# Altium PCB PCB_mounting.PcbDoc (part 3 of 4)
Units mm, origin at the board's own origin, x right, y up, seen from the top; angles counter-clockwise.
Board outline 75 x 100 mm, 4 copper layers (Top Layer, Int1 (GND), Int2 (PWR), Bottom Layer), stack 1.586 mm thick; 145 components, 97 nets, 660 pads, 380 vias.
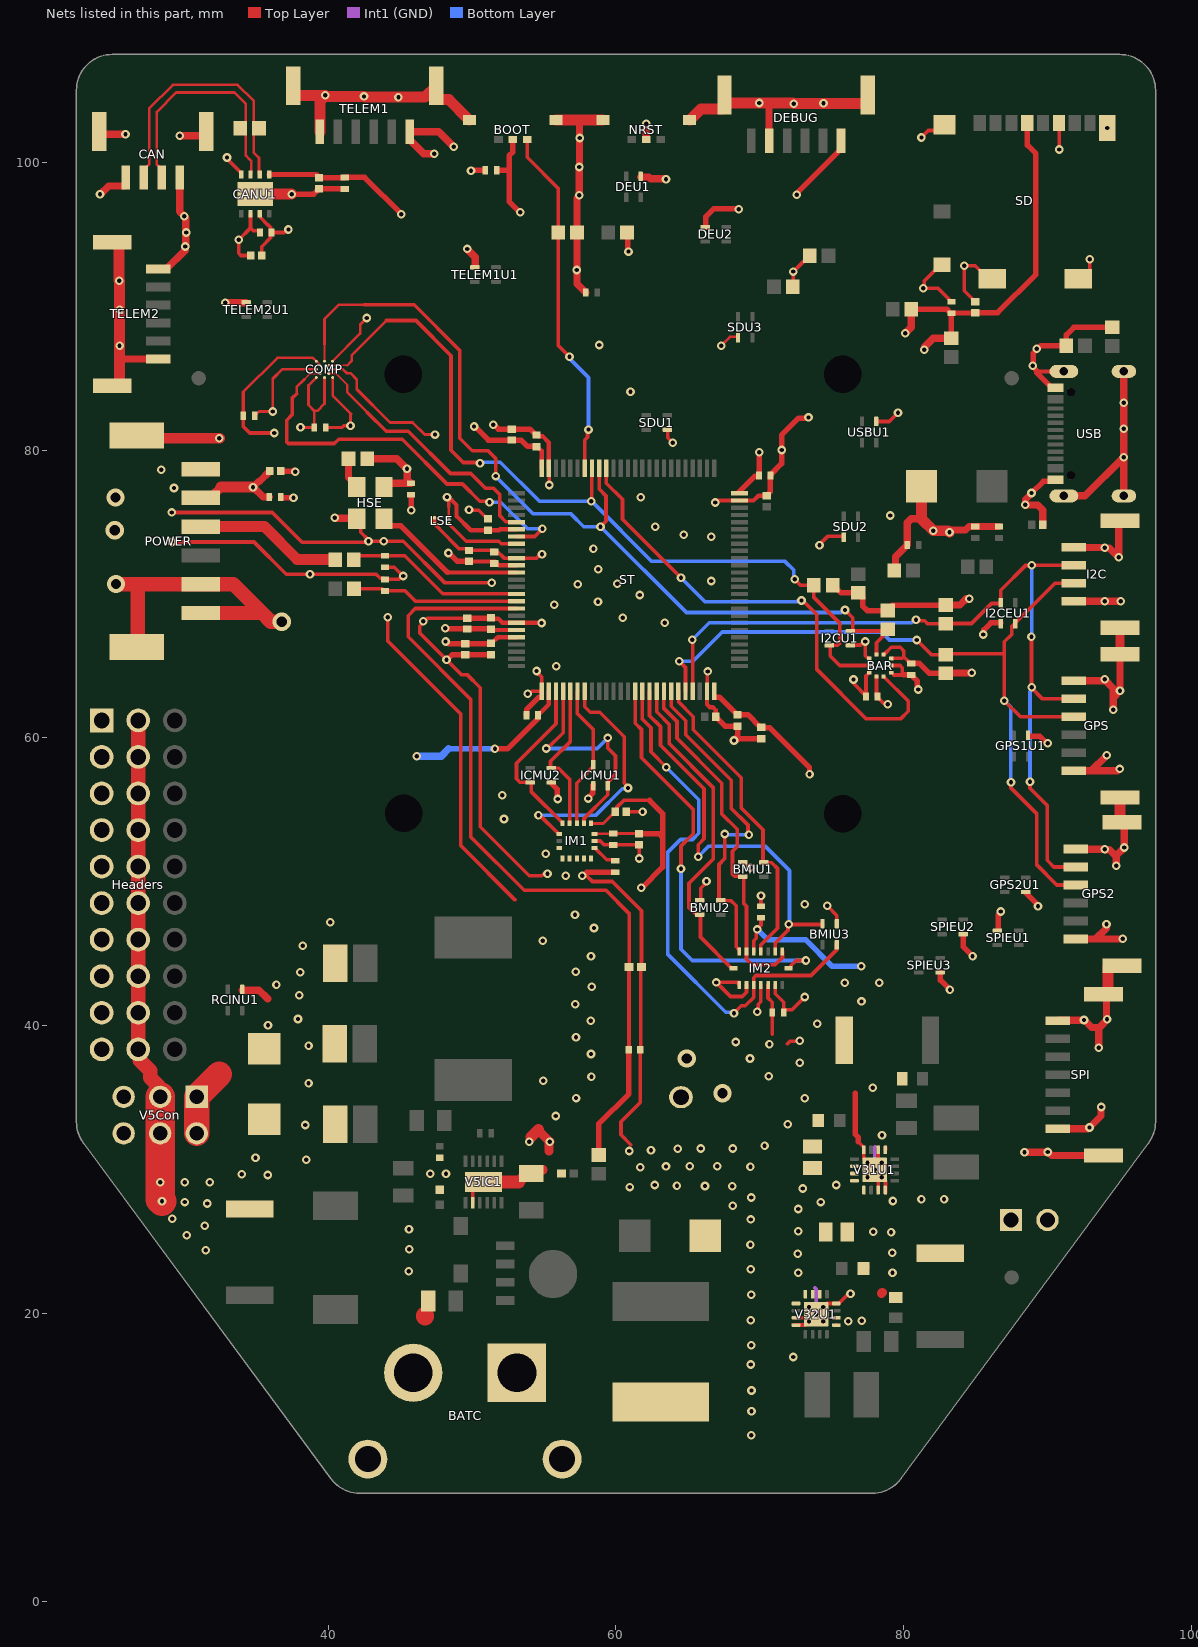
[diagram p4: the nets of this part, all layers, seen from the top]

## Via types
v1: diameter 0.6, hole 0.3, Top Layer to Bottom Layer, 358 vias
v2: diameter 0.5, hole 0.3, Top Layer to Bottom Layer, 10 vias
v3: diameter 1.27, hole 0.711, Top Layer to Bottom Layer, 6 vias
v4: diameter 0.55, hole 0.3, Top Layer to Bottom Layer, 6 vias

## Nets (pads, with @x,y where several pads share a name; then routed paths per layer and width w, separated by ;. In a path a pad name is that pad's centre, name@x,y a point inside that pad or via, vN(x,y) a via of type N, cw(c..) or ccw(c..) an arc to the next point about the centre after c; other vN are vias at no path point)
"+3V3 Core": BAR.1 BAR.6 BAR.10 BMIC1.1 BMIC2.1 BMMC1.1 BMMC2.1 BMPC1.1 BMPC2.1 BOOT.3 BOOTC1.1 CANC3.1 CANC4.1 CANU1.5 COMP.A1 COMP.B2 COMP.E5 DEBUG.1 HSE.4 HSEC1.1 HSER1.1 I2CER1.1 I2CER2.1 I2CR1.1 I2CR2.1 ICMC1.1 ICMC2.1 ICMC3.1 IM1.1 IM1.16 IM2.3 IM2.11 LSE.3 NRSTR.2 pad.8 SD.4 SDC1.1 SDC2.1 SDR1.1 SDR2.1 SDR3.1 SDR4.1 SDR5.1 ST.6 ST.11 ST.20 ST.21 ST.27 ST.50 ST.75 ST.100 STC1.1 STC2.1 STC3.1 STC4.1 STC5.1 STC6.1 STC7.1 STC8.1 STC9.1 STC10.1 STC11.1 STC12.1 STC13.1 V31R0.2 | length 183.2
  Top Layer w0.178: 36.474,86.411 38.938,86.411 COMP.A1@39.175,86.174 COMP.B2@39.458,85.891 ; COMP.E5@40.307,85.042 40.307,83.802 41.59,82.52 ; LSE.3@48.387,75.286 48.387,76.068
  Top Layer w0.191: 34.093,84.03 36.474,86.411
  Top Layer w0.2: IM1.1@58.277,54.057 59.118,54.057 59.925,54.864 ICMC3.1@59.946,54.864 ; IM1.16@58.502,53.332 59.79,53.332 ICMC1.1@59.817,53.359 59.828,53.348 61.584,53.348 ICMC2.1@61.595,53.338
  Top Layer w0.229: BMMC1.1@39.833,81.572 40.975,81.572 41.089,81.686 41.548,81.686 v1(41.554,81.693) 41.554,82.484
  Top Layer w0.254: 34.093,84.03 BMMC2.1@34.093,82.385 34.093,81.642 34.544,81.191 v1(36.246,81.191) ; v1(48.26,76.733) 48.387,76.606 48.387,76.068 ; v1@48.434,76.653 48.524,76.563 48.545,76.563 ; STC4.1@49.784,72.265 STC4.1@49.795,72.255 ; STC7.1@51.551,72.255 STC7.1@51.562,72.244 ; 51.873,74.428 51.938,74.493 ; STC6.1@54.578,61.62 54.651,61.693 STC6.1@54.701,61.693 ; ICMC3.1@59.946,54.864 59.968,54.864 60.077,54.973 60.077,55.194 60.535,55.651 62.332,55.651 ; ST.50@66.833,63.243 66.833,62.874 ST.50@66.874,62.833 ; STC10.1@68.403,61.614 STC10.1@68.453,61.614 ; ST.75@68.583,76.993 ST.75@68.583,77.117 ; IM2.11@69.571,45.154 69.571,45.877 69.758,46.065 69.758,46.619 v1(69.825,46.685) 69.825,46.74 70.079,46.994 BMIC2.1@70.079,47.504 ; STC11.1@70.054,60.725 STC11.1@70.104,60.725 ; IM2.3@70.571,42.824 70.571,41.913 70.86,41.624 BMIC1.1@70.86,40.919 70.86,39.395 ; 71.922,38.746 72.09,38.914 72.747,38.914 v1(72.771,38.938) ; SDR5.1@72.278,91.351 72.326,91.4 v1(72.326,92.405) 72.717,92.796 72.717,92.798 73.417,93.497 SDR4.1@73.467,93.497 ; BAR.6@78.109,64.259 78.109,62.931 BMPC1.1@78.175,62.865 78.175,62.815 78.592,62.398 78.826,62.398 v1(78.892,62.332) ; BAR.1@78.609,65.789 78.624,65.789 79.129,66.294 79.756,66.294 80.01,66.04 80.01,65.628 ; BAR.10@79.124,65.524 79.906,65.524 80.01,65.628 ; BMPC2.1@80.518,65.17 80.468,65.17 80.01,65.628 ; SDC2.1@84.952,89.527 SDC2.1@84.963,89.537
  Top Layer w0.3: 48.545,76.563 48.923,76.185 48.923,75.41 49.905,74.428 STC5.1@51.105,74.428 51.873,74.428 ; STC4.1@49.795,72.255 STC7.1@51.551,72.255 ; STC13.1@51.308,67.545 51.358,67.495 51.582,67.495 51.584,67.493 ST.20@53.083,67.493 ; STC9.1@51.358,66.567 51.784,66.993 ST.21@53.083,66.993 ; STC7.1@51.612,72.244 51.863,71.993 ST.11@53.083,71.993 ; 51.938,74.493 ST.6@53.083,74.493 ; STC12.1@54.533,80.245 54.833,79.945 ST.100@54.833,78.743 ; STC6.1@54.701,61.693 55.333,62.324 ST.27@55.333,63.243
  Top Layer w0.381: CANU1.5@35.9,99.152 39.172,99.152 39.37,98.954 CANC4.1@39.37,98.933 41.079,98.933 41.098,98.952 CANC3.1@41.148,98.952 42.526,98.952 v1(45.085,96.393) ; v1(48.146,67.615) 48.205,67.615 48.253,67.566 STC1.1@49.657,67.566 51.237,67.566 51.258,67.545 STC13.1@51.308,67.545 ; v1(48.158,66.7) 48.218,66.7 48.372,66.546 STC2.1@49.53,66.546 51.287,66.546 STC9.1@51.297,66.556 ; v1(48.355,72.842) 48.399,72.842 48.976,72.265 STC4.1@49.784,72.265 ; v1(50.14,81.636) 50.199,81.636 51.136,80.698 53.414,80.698 53.856,80.256 54.292,80.256 54.293,80.255 STC12.1@54.472,80.255 ; v1(51.587,59.233) 52.451,59.233 54.578,61.36 STC6.1@54.578,61.57 ; BOOTC1.1@51.708,99.441 52.451,99.441 52.578,99.314 ; BOOT.3@52.832,101.585 52.832,100.711 52.578,100.457 52.578,99.314 ; v1(53.34,96.52) 52.578,97.282 52.578,99.314 ; NRSTR.2@60.772,95.123 60.83,95.064 60.83,93.838 v1(60.872,93.796) ; ICMC2.1@61.595,53.338 62.994,53.338 63.246,53.086 ; v1(61.747,49.581) 61.811,49.581 63.246,51.016 63.246,53.086 ; 62.332,55.651 63.246,54.737 63.246,53.086 ; ST.50@66.874,62.833 67.184,62.833 STC10.1@68.403,61.614 ; STC10.1@68.453,61.614 69.165,61.614 STC11.1@70.054,60.725 ; ST.75@68.583,77.117 69.638,78.173 69.93,78.173 69.939,78.182 STC8.1@69.939,78.232 69.945,78.238 69.945,79.851 v1(69.952,79.858) ; STC11.1@70.104,60.725 70.116,60.713 70.681,60.713 73.45,57.944 73.45,57.487 v1(73.457,57.48) ; v1(72.568,97.739) 72.61,97.781 72.61,97.902 75.642,100.934 DEBUG.1@75.642,101.484 ; I2CR1.1@75.057,70.612 75.107,70.612 75.645,70.074 SDR2.1@76.835,70.074 77.145,69.764 77.145,69.159 77.47,68.834 78.755,68.834 I2CR2.1@78.867,68.722 ; I2CR2.1@78.88,68.849 78.88,68.899 79.189,69.209 79.391,69.209 79.412,69.23 I2CER2.1@82.931,69.23 ; BMPC2.1@80.518,65.17 81.091,65.17 81.775,64.486 I2CER1.1@82.931,64.486 ; SDR1.1@80.533,89.789 82.989,89.789 83.251,89.527 SDC2.1@84.952,89.527 ; SDR3.1@83.312,87.772 SDC1.1@83.312,89.516 ; SDC2.1@84.963,89.553 86.53,89.553 89.179,92.202 89.179,100.609 88.587,101.202 SD.4@88.587,102.732
  Top Layer w0.508: HSER1.1@42.712,79.4 44.755,79.4 45.454,78.702 v1(45.479,78.702) 45.496,78.684 45.496,77.954 HSEC1.1@45.758,77.692 44.141,77.692 HSE.4@43.876,77.427 ; v1(80.112,88.113) 80.533,88.534 SDR1.1@80.533,89.789 ; v1(81.432,86.97) 81.45,86.987 81.45,87.172 82.05,87.772 SDR3.1@83.312,87.772 ; I2CER1.1@82.931,64.486 82.946,64.501 84.719,64.501 v1(84.734,64.516) ; I2CER2.1@82.931,69.23 83.908,69.23 84.35,69.672 v1(84.557,69.672)
  Bottom Layer w0.381: 48.362,59.233 v1(51.587,59.233) ; v1(69.825,46.685) 70.536,45.974 73.177,45.974 75.032,44.12 v1(77.038,44.12)
  Bottom Layer w0.508: v1@46.177,58.725 47.854,58.725 48.362,59.233
  other v1: 70.612,36.474 72.771,37.414 69.317,37.719 70.665,38.698 68.326,38.862 73.992,40.137 77.064,41.681 75.895,42.977 78.308,42.977 46.152,58.725
  other v3: 67.412,35.306 64.922,37.719
"+3V3 Sens": J1Sens.1 V32R0.2
+5: CAN.1 CANC1.1 CANC2.1 CANU1.3 GPS2.1 GPS.1 Headers.2 Headers.5 Headers.8 Headers.11 Headers.14 Headers.17 Headers.20 Headers.23 Headers.26 Headers.29 I2C.1 POWC3.1 POWC4.1 POWER.1 POWER.2 SPI.1 TELEM1.1 TELEM2.1 V5Con.3 V5Con.4 V5D2.1 V5R0.2 V31C1.1 V31U1.10 V31U1.11 V31U1.12 V31U1.13 V32C1.1 V32U1.10 V32U1.11 V32U1.12 V32U1.13 | length 76.3
  Top Layer w0.254: CANU1.3@35.25,96.428 35.273,96.405 35.273,96.18 35.804,95.648 35.822,95.648 35.989,95.482 35.989,95.196 CANC1.1@36.062,95.123 35.989,95.05 35.989,94.749 35.38,94.14 CANC2.1@35.38,93.523 ; CANC1.1@36.135,95.123 36.94,95.123 37.143,95.326 v1(37.236,95.326)
  Top Layer w0.508: TELEM2.1@28.194,92.583 28.744,92.583 30.058,93.897 30.058,94.128 v1(30.076,94.146) 30.076,94.171 30.107,94.202 30.107,95.105 v1(30.124,95.123) 30.107,95.141 30.107,96.106 29.997,96.216 29.997,96.265 29.688,96.575 CAN.1@29.688,98.944 ; POWC3.1@35.897,76.733 35.481,76.733 34.795,77.419 v1(34.77,77.419) 35.162,77.811 35.232,77.811 35.943,78.523 POWC4.1@35.943,78.537 ; v1(47.371,100.584) 47.353,100.602 46.637,100.602 45.67,101.569 TELEM1.1@45.67,102.119 47.69,102.119 v1(48.717,101.092) ; SPI.1@90.689,32.826 92.796,32.826 92.888,32.918 v1(92.913,32.918) 93.716,33.721 93.716,34.328 v1(93.733,34.345) ; GPS.1@91.832,57.708 93.042,57.708 ; I2C.1@91.832,69.499 v1(93.962,69.499) ; GPS2.1@91.959,46.024 GPS2.1@92.509,46.024 ; GPS2.1@92.509,46.027 93.347,46.027 ; v1(93.962,69.499) v1(95.08,69.499) ; v1(94.089,47.045) 94.071,47.028 94.071,46.751 93.347,46.027 ; v1@94.097,58.762 93.042,57.708 ; v1(95.003,57.84) 94.978,57.84 94.846,57.708 93.042,57.708 ; v1(95.232,46.029) 95.229,46.027 93.347,46.027
  Top Layer w0.635: POWER.2@31.145,76.676 31.995,76.676 32.178,76.859 32.178,77.047 32.55,77.419
  Top Layer w0.762: 32.55,77.419 v1(34.77,77.419)
  Top Layer w1.016: Headers.2@26.797,61.214 Headers.5@26.797,58.674 Headers.8@26.797,56.134 Headers.11@26.797,53.594 Headers.14@26.797,51.054 Headers.17@26.797,48.514 Headers.20@26.797,45.974 Headers.23@26.797,43.434 Headers.26@26.797,40.894 Headers.29@26.797,38.354 26.918,38.233 26.918,37.589 27.635,36.872 27.635,36.373 28.219,35.789 28.219,35.154 V5Con.3@28.321,35.052
  Top Layer w2.032: V5Con.3@28.321,35.052 28.321,27.915 v1(28.448,27.788)
  other v1: 72.669,22.835 72.644,24.155 31.496,24.384 30.175,25.425 72.669,25.705 31.42,26.086 29.159,26.568 72.669,27.254 31.598,27.635 30.023,27.737 74.224,27.736 72.974,28.677 75.303,28.921 28.321,29.108 30.023,29.108 31.775,29.108 35.789,29.616 33.985,29.667 34.95,30.81 94.114,58.78 29.286,77.368 28.397,78.638 29.997,96.241
  other v3: 25.171,74.422 25.222,76.708
"BAT (6-36)V": BATC.1 V5F1.1
BATT_C: POWC2.1 POWR1.2 ST.15 | length 12.5
  Top Layer w0.254: POWR1.2@41.783,72.39 42.056,72.663 POWC2.1@43.942,72.663 45.32,72.663 47.967,70.016 53.06,70.016 ST.15@53.083,69.993
BATT_V: POWC1.1 POWR2.2 ST.16 | length 11.6
  Top Layer w0.254: POWR2.2@41.798,70.358 43.746,70.358 43.892,70.212 45.347,70.212 46.066,69.493 ST.16@53.083,69.493
BATT_V_Direct: ST.17 V5Div1.2 V5Div2.1 V5DivC.1 | length 55.8
  Top Layer w0.254: ST.17@53.083,68.993 46.057,68.993 45.555,68.491 45.555,67.018 49.911,62.662 49.911,53.111 53.619,49.403 59.309,49.403 60.912,47.8 V5DivC.1@60.912,44.069 60.901,44.058 60.901,38.34 V5Div2.1@60.89,38.329
  Top Layer w0.381: V5Div1.2@58.801,31.003 58.801,33.172 60.89,35.262 V5Div2.1@60.89,38.329
BM_I2C_SCL: BAR.2 COMP.A3 I2CR2.2 I2CU1.5 ST.92 | length 63.4
  Top Layer w0.127: COMP.A3@39.741,86.174 39.741,87.341
  Top Layer w0.178: 39.741,87.341 39.741,89.106 40.729,90.094 42.494,90.094
  Top Layer w0.254: 42.494,90.094 45.974,90.094 49.149,86.919 49.149,80.823 50.013,79.959 51.108,79.959 51.651,79.417 v1(51.651,78.194) ; ST.92@58.833,78.743 58.833,77.287 59.309,76.811 59.309,75.057 v1(58.928,74.676) ; v1(75.921,68.885) 76.454,68.351 76.454,67.452 76.431,67.429 I2CU1.5@76.3,67.429 ; I2CU1.5@76.315,67.429 78.797,67.429 78.797,67.302 78.109,66.614 BAR.2@78.109,65.789
  Bottom Layer w0.254: v1(51.651,78.194) 51.651,78.168 54.254,75.565 56.871,75.565 57.76,74.676 v1(58.928,74.676) 64.897,68.707 75.649,68.707 75.827,68.885 v1(75.921,68.885)
BM_I2C_SDA: BAR.4 COMP.B4 I2CR1.2 I2CU1.3 ST.93 | length 58.2
  Top Layer w0.127: COMP.B4@40.024,85.891 41.326,85.891
  Top Layer w0.178: 41.326,85.891 41.631,86.195 41.631,86.589 44.044,89.002 ; ST.93@58.313,78.723 ST.93@58.333,78.743 ; I2CU1.3@74.89,66.429 I2CU1.3@74.906,66.445
  Top Layer w0.254: 44.044,89.002 46.101,89.002 48.539,86.563 48.539,79.985 49.382,79.142 50.5,79.142 v1(50.546,79.096) ; v1(58.293,76.454) 58.313,76.474 ST.93@58.313,78.723 ; v1(72.415,71.018) 72.42,71.018 72.826,70.612 I2CR1.2@73.757,70.612 ; I2CR1.2@73.757,70.208 73.757,69.753 75.565,67.945 75.565,66.594 75.416,66.445 I2CU1.3@74.906,66.445 ; I2CU1.3@74.89,66.429 74.89,65.695 75.561,65.024 BAR.4@77.594,65.024
  Bottom Layer w0.254: v1(50.546,79.096) 50.612,79.162 51.953,79.162 54.661,76.454 v1(58.293,76.454) 62.484,72.263 71.755,72.263 72.349,71.669 72.349,71.085 v1(72.415,71.018)
BMI_SPI_CS_A: BMIU3.5 IM2.14 ST.41 | length 29
  Top Layer w0.254: ST.41@62.333,63.243 62.333,61.543 63.094,60.782 63.094,59.487 66.116,56.464 66.116,52.984 65.71,52.578 v1(65.71,51.74) ; IM2.14@71.071,45.154 71.071,45.747 71.959,46.635 71.959,46.991 v1(72.009,47.041) 72.02,47.03 74.343,47.03 BMIU3.5@74.354,47.019
  Bottom Layer w0.254: v1(65.71,51.74) 66.446,52.476 70.358,52.476 72.06,50.775 72.06,47.092 v1(72.009,47.041)
BMI_SPI_CS_G: BMIU3.3 IM2.5 ST.40 | length 37.8
  Top Layer w0.254: ST.40@61.833,63.243 61.833,61.306 62.433,60.706 62.433,59.03 v1(63.5,57.963) ; v1(68.199,40.869) 68.702,41.372 68.981,41.372 69.571,41.961 IM2.5@69.571,42.824 69.571,43.332 69.723,43.485 73.558,43.485 75.331,45.257 75.331,45.646 BMIU3.3@75.354,45.669
  Bottom Layer w0.254: v1(63.5,57.963) 65.761,55.702 65.761,53.378 65.316,52.934 64.491,52.934 63.589,52.032 63.589,44.971 67.625,40.935 68.133,40.935 v1(68.199,40.869)
BMI_SPI_INT_A: IM2.16 ST.39 | length 30.5
  Top Layer w0.254: ST.39@61.333,63.243 61.333,61.019 61.773,60.579 61.773,58.623 65.38,55.016 65.38,53.34 64.516,52.476 v1(64.516,50.902) ; IM2.16@71.986,43.989 72.131,43.989 72.154,44.012 72.154,44.157 72.522,44.526 v1(73.203,44.526)
  Bottom Layer w0.254: v1(64.516,50.902) 64.516,45.314 65.303,44.526 v1(73.203,44.526)
BMI_SPI_INT_G: BMIU1.3 IM2.12 ST.45 | length 21.8
  Top Layer w0.254: ST.45@64.333,63.243 64.356,63.22 64.356,62.492 65.38,61.468 65.38,60.554 68.707,57.226 68.707,55.125 70.22,53.612 70.22,51.351 70.243,51.328 70.821,51.328 71.222,50.927 71.222,46.761 70.071,45.61 IM2.12@70.071,45.154
BMI_SPI_MISO: BMIU1.5 IM2.10 IM2.15 ST.43 | length 24.8
  Top Layer w0.254: ST.43@63.333,63.243 63.333,62.041 64.238,61.137 64.238,59.968 67.361,56.845 67.361,54.712 68.428,53.645 68.428,52.451 68.097,52.121 68.097,50.523 68.246,50.374 68.787,50.374 BMIU1.5@68.81,50.351 ; BMIU1.5@68.87,50.328 68.87,48.503 69.071,48.303 69.071,44.62 69.469,44.221 71.056,44.221 71.571,44.735 IM2.15@71.571,45.154
BMI_SPI_MOSI: BMIU2.3 IM2.9 ST.44 | length 23.3
  Top Layer w0.254: ST.44@63.833,63.243 63.833,62.202 64.846,61.189 64.846,60.223 68.021,57.048 68.021,55.093 69.174,53.94 69.174,53.33 v1(69.24,53.264) ; v1(67.564,53.315) 67.564,51.613 67.157,51.205 67.157,48.732 67.18,48.709 67.223,48.709 67.246,48.686 68.001,48.686 68.351,48.336 68.351,45.473 68.502,45.322 68.569,45.322 68.571,45.32 IM2.9@68.571,45.154
  Bottom Layer w0.254: v1(67.564,53.315) 67.615,53.264 v1(69.24,53.264)
BMI_SPI_SCK: BMIU2.5 IM2.8 ST.42 | length 23.1
  Top Layer w0.254: ST.42@62.833,63.243 62.833,61.805 63.703,60.935 63.703,59.603 66.751,56.555 66.751,51.562 65.075,49.886 65.075,48.206 65.548,47.732 65.85,47.732 65.873,47.709 65.873,46.152 68.036,43.989 IM2.8@68.156,43.989
BMM_I2C_DRDY: COMP.D4 ST.5 | length 18.5
  Top Layer w0.127: COMP.D4@40.024,85.325 40.532,85.325 41.351,84.506
  Top Layer w0.178: 41.332,84.487 41.332,84.004 42.733,82.603
  Top Layer w0.254: 42.733,82.603 44.031,81.305 45.568,81.305 48.501,78.372 49.898,78.372 50.927,77.343 51.486,77.343 51.935,76.894 51.935,75.429 52.348,75.016 53.06,75.016 ST.5@53.083,74.993
BMM_I2C_INT: COMP.D2 ST.7 | length 28.7
  Top Layer w0.127: 38.354,84.925 38.754,85.325 COMP.D2@39.458,85.325
  Top Layer w0.191: 37.808,83.922 37.808,84.379 38.354,84.925
  Top Layer w0.254: 37.808,83.922 37.49,83.604 37.49,82.448 37.122,82.08 37.122,80.559 37.226,80.454 40.424,80.454 40.729,80.759 45.148,80.759 48.26,77.648 49.327,77.648 50.531,76.444 51.14,76.444 v1(51.206,76.378) ; ST.7@53.083,73.993 54.359,73.993 v1(54.889,74.524)
  Bottom Layer w0.254: v1(51.206,76.378) 51.994,76.378 53.848,74.524 v1(54.889,74.524)
BMP_I2C_INT: BAR.7 ST.91 | length 35.3
  Top Layer w0.254: ST.91@59.333,78.743 59.333,77.7 60.452,76.581 60.452,75.184 v1(64.516,71.12) ; v1(72.898,69.545) 72.974,69.545 73.965,68.555 73.965,64.745 77.394,61.316 79.781,61.316 80.315,61.849 80.315,62.553 78.647,64.221 78.619,64.221 BAR.7@78.619,64.248
  Bottom Layer w0.254: v1(64.516,71.12) 66.167,69.469 72.577,69.469 72.587,69.479 72.832,69.479 v1(72.898,69.545)
CAN_N: CAN.3 CANR1.1 CANU1.6 | length 18.4
  Top Layer w0.182: CAN.3@27.188,99.494 27.559,99.865 27.559,103.732 29.216,105.389 33.71,105.389 34.813,104.287 34.813,102.743 CANR1.1@35.194,102.362 34.813,101.981 34.813,100.695 35.194,100.314 35.194,99.209 CANU1.6@35.25,99.152
CAN_P: CAN.2 CANR1.2 CANU1.7 | length 16.6
  Top Layer w0.182: CAN.2@28.438,99.494 28.097,99.835 28.097,103.509 29.439,104.851 33.488,104.851 34.275,104.064 34.275,102.743 CANR1.2@33.894,102.362 34.275,101.981 34.275,100.472 34.544,100.203 34.656,100.091 34.656,99.209 CANU1.7@34.6,99.152
GND: BAR.3 BAR.5 BAR.8 BAR.9 BATC.2 BATC.3 BATC.4 BMIC1.2 BMIC2.2 BMIU1.4 BMIU2.4 BMIU3.4 BMMC1.2 BMMC2.2 BMPC1.2 BMPC2.2 BOOT.4 BOOT.5 BOOTC1.2 BOOTR1.2 CAN.4 CAN.5 CAN.6 CANC1.2 CANC2.2 CANC3.2 CANC4.2 CANU1.2 CANU1.8 CANU1.9 COMP.A5 COMP.C1 COMP.C5 COMP.E1 COMP.E3 DEBUG.5 DEBUG.7 DEBUG.8 DEU1.4 DEU2.4 GPS1U1.4 GPS2.6 GPS2.7 GPS2.8 GPS2U1.4 GPS.6 GPS.7 GPS.8 Headers.1 Headers.4 Headers.7 Headers.10 Headers.13 Headers.16 Headers.19 Headers.22 Headers.25 Headers.28 HSE.2 HSEC1.2 I2C.4 I2C.5 I2C.6 I2CEU1.4 I2CU1.4 ICMC1.2 ICMC2.2 ICMC3.2 ICMC4.2 ICMU1.4 ICMU2.4 IM1.8 IM1.9 IM1.10 IM1.11 IM1.12 IM1.13 IM1.15 IM2.2 IM2.4 IM2.6 IM2.7 J1Sens.2 LSE.1 LSE.4 NRST.3 NRST.4 NRST.5 NRST_C1.2 pad.MH POWC1.2 POWC2.2 POWC3.2 POWC4.2 POWER.5 POWER.6 POWER.MP1 POWER.MP2 RCINU1.4 SD.6 SD.10 SD.G1 SD.G2 SD.G3 SD.G4 SDC1.2 SDC2.2 SDU1.S SDU2.4 SDU3.4 SPI.7 SPI.8 SPI.9 SPIEU1.4 SPIEU2.4 SPIEU3.4 ST.10 ST.19 ST.26 ST.49 ST.74 ST.99 STC1.2 STC2.2 STC3.2 STC4.2 STC5.2 STC6.2 STC7.2 STC8.2 STC9.2 STC10.2 STC11.2 STC12.2 STC13.2 TELEM1.6 TELEM1.7 TELEM1.8 TELEM1U1.4 TELEM2.6 TELEM2.7 TELEM2.8 TELEM2U1.4 USB.A1_B12 USB.B1_A12 USB.S1 USB.S2 USB.S3 USB.S4 USBC1.2 USBC2.2 USBC3.2 USBC4.2 USBD1.2 USBR1.2 USBR2.2 USBR4.2 USBU1.4 V5C1in.2 V5C2in.2 V5C4.2 V5C5.2 V5C6.2 V5Con.1 V5Con.2 V5Con.5 V5Con.6 V5D1.2 V5D2.2 V5Div2.2 V5DivC.2 V5IC1.8 V5IC1.13 V5R1.2 V5R2.2 V5R5.2 V31C1.2 V31C2.2 V31C3.2 V31U1.5 V31U1.6 V31U1.8 V31U1.15 V31U1.16 V31U1.17@77.978,29.972 V32C1.2 V32C2.2 V32C3.2 V32U1.5 V32U1.6 V32U1.8 V32U1.15 V32U1.16 V32U1.17@73.914,19.939 VCAP1.2 VCAP2.2 | length 501.3
  Top Layer w0.165: 36.795,85.608 COMP.C1@39.175,85.608 ; COMP.C5@40.307,85.608 41.024,85.608
  Top Layer w0.178: 38.633,84.5 COMP.E1@39.175,85.042 ; 39.741,83.226 COMP.E3@39.741,85.042 ; COMP.A5@40.307,86.174 42.226,88.092
  Top Layer w0.191: BMMC2.2@34.893,82.385 34.893,82.435 34.998,82.54 35.048,82.54 35.185,82.677 v1(36.144,82.677) 36.144,84.957 36.795,85.608 ; 38.633,84.5 38.633,83.128 39.033,82.728 ; BMMC1.2@39.033,81.572 39.033,82.728 ; 39.741,83.226 39.243,82.728 39.033,82.728 ; 41.024,85.608 41.288,85.344 41.542,85.344 41.986,84.9 41.986,84.226 44.298,81.915 45.872,81.915 46.711,81.077 v1(47.422,81.077) ; 42.226,88.092 42.226,88.733 v1(42.672,89.179) ; v1(67.31,87.249) 67.93,87.869 SDU3.4@68.486,87.869
  Top Layer w0.2: v1(38.075,81.585) 38.081,81.578 38.995,81.578 BMMC1.2@39.017,81.556 ; CANC4.2@39.212,98.018 CANC4.2@39.234,98.018 ; CANC4.2@39.37,98.154 CANC4.2@39.37,98.176 CANC4.2@39.382,98.164 ; CANC3.2@41.136,98.164 CANC3.2@41.148,98.152
  Top Layer w0.254: v1(29.134,73.609) 34.849,73.609 37.084,71.374 v1(38.735,71.374) 43.321,71.374 43.61,71.085 43.869,71.085 POWC1.2@43.942,71.012 44.883,71.012 45.118,71.247 v1(45.212,71.247) 44.596,71.863 POWC2.2@43.942,71.863 POWC2.2@43.892,71.863 ; v1(29.134,75.667) 36.119,75.667 38.186,73.6 42.739,73.6 v1(42.799,73.66) ; v1(32.969,100.33) 32.969,100.246 33.95,99.265 CANU1.8@33.95,99.152 ; CANU1.2@34.6,96.428 34.6,95.433 ; CANC2.2@34.601,93.523 33.931,93.523 33.782,93.672 v1(33.782,94.615) 34.6,95.433 ; CANC1.2@35.262,95.123 35.262,95.173 35.189,95.246 34.787,95.246 34.6,95.433 ; HSE.2@41.976,75.227 42.258,74.945 42.258,74.295 42.799,73.754 v1(42.799,73.66) ; v1(44.145,68.389) 44.145,66.726 49.212,61.658 49.212,52.514 52.99,48.737 ; LSE.4@47.387,75.286 LSE.1@47.387,74.876 47.714,74.549 47.714,74.525 49.095,73.144 49.675,73.144 49.784,73.035 STC4.2@49.784,73.023 49.795,73.033 51.551,73.033 51.562,73.044 51.635,72.971 51.747,72.971 52.225,72.493 ST.10@53.083,72.493 54.492,72.493 54.77,72.771 v1(54.864,72.771) ; STC1.2@49.657,68.324 46.929,68.324 46.703,68.097 v1(46.609,68.097) 46.609,68.004 46.363,67.758 46.363,67.289 v1(48.222,65.43) 49.256,64.396 49.65,64.396 50.571,63.475 50.571,53.823 53.975,50.419 54.851,50.419 54.94,50.508 ; v1(49.784,75.844) 49.81,75.818 50.465,75.818 50.982,75.301 50.982,75.262 STC5.2@51.016,75.228 ; v1(49.923,99.423) v1@49.933,99.432 ; V5IC1.8@50.046,27.686 50.046,28.563 50.619,29.136 V5IC1.13@50.796,29.136 ; BOOTC1.2@50.899,99.432 BOOTC1.2@50.908,99.441 ; STC13.2@51.308,68.345 STC13.2@51.381,68.272 ; v1(51.371,70.79) 48.082,70.79 45.212,73.66 v1(43.866,73.66) v1(42.799,73.66) ; STC6.2@53.778,61.57 53.778,61.629 STC6.2@53.778,61.738 ; v1(53.873,63.068) 53.967,63.068 54.142,63.243 ST.26@54.833,63.243 ; v1(54.483,64.643) 54.483,64.574 54.833,64.224 ST.26@54.833,63.243 ; STC12.2@54.483,81.045 STC12.2@54.556,80.972 ; ST.26@54.792,62.833 54.833,62.874 ST.26@54.833,63.243 ; v1@54.823,67.986 v1(54.831,67.978) ; ST.99@55.333,78.743 55.353,78.724 55.353,77.591 v1(55.372,77.572) ; 58.014,50.368 58.369,50.013 59.741,50.013 61.77,47.984 V5DivC.2@61.77,44.069 61.73,44.029 61.73,38.368 V5Div2.2@61.69,38.329 61.69,34.665 60.35,33.325 60.35,32.41 61.036,31.725 ; IM1.15@58.502,52.832 58.504,52.83 58.915,52.83 59.186,52.559 ICMC1.2@59.817,52.559 59.828,52.57 61.584,52.57 ICMC2.2@61.595,52.58 ; ICMC3.2@60.704,54.864 v1(61.849,54.864) ; ICMC2.2@61.595,52.559 61.608,52.546 61.608,51.625 v1(61.62,51.613) ; SDU1.S@63.6,81.339 63.6,80.854 v1(63.949,80.505) ; BMIU2.4@65.873,48.709 65.873,48.716 65.889,48.732 65.889,49.54 66.294,49.944 v1(66.294,50.038) ; ST.49@66.333,63.243 66.352,63.262 66.352,64.599 v1(66.37,64.618) ; v1(66.896,76.36) 66.99,76.36 v1@67.122,76.493 ; v1@68.199,59.911 v1(68.199,59.817) 68.265,59.883 v1@68.479,59.883 ; IM2.7@68.571,42.824 68.571,42.99 68.569,42.992 68.403,42.992 68.393,43.002 v1(66.98,43.002) 67.957,42.025 68.771,42.025 69.07,42.324 IM2.6@69.071,42.824 ; BMIU1.4@68.87,51.351 68.945,51.351 69.318,50.978 v1(69.342,50.978) ; v1(69.825,40.957) 69.891,41.024 69.891,41.487 70.071,41.666 IM2.4@70.071,42.824 ; BMIC2.2@70.079,48.304 v1(70.079,49.022) ; VCAP1.2@70.485,76.833 VCAP1.2@70.485,76.854 ; STC8.2@70.739,78.232 70.812,78.305 STC8.2@70.812,78.355 ; IM2.2@71.071,42.824 71.071,42.213 71.663,41.621 71.663,41.132 71.736,41.059 71.79,41.113 72.254,41.113 v1(73.127,41.986) ; v1(72.314,16.967) v1@72.38,17.033 ; V32U1.16@72.38,19.187 72.382,19.189 V32U1.16@72.514,19.189 73.164,19.189 v2(73.414,19.439) 73.414,19.466 73.191,19.689 V32U1.15@72.514,19.689 ; v1@73.335,82.225 v1(73.381,82.271) ; v1(74.143,73.381) 74.143,73.434 74.71,74.001 SDU2.4@75.827,74.001 ; V32U1.17@74.414,19.466 V32U1.17@74.637,19.689 ; v2(74.414,20.439) 74.664,20.689 V32U1.8@75.314,20.689 75.485,20.689 76.091,21.295 76.235,21.295 v1(76.302,21.361) ; v1(74.676,48.323) 75.354,47.646 BMIU3.4@75.354,47.079 BMIU3.4@75.354,47.019 ; V32U1.5@75.314,19.189 V32U1.5@75.316,19.191 ; V32U1.6@75.314,19.689 V32U1.6@75.316,19.687 ; v1(76.139,19.453) v1@76.154,19.438 ; I2CU1.4@76.24,66.429 76.263,66.452 76.996,66.452 77.244,66.7 v1(77.318,66.7) 77.318,65.721 77.466,65.572 77.518,65.572 77.566,65.524 BAR.3@77.594,65.524 ; v1(76.505,64.059) 76.571,63.993 76.571,63.719 BMPC1.2@77.375,62.915 ; 76.835,31.936 77.228,31.543 V31U1.8@77.228,31.372 77.228,30.722 v2(77.478,30.472) ; BMPC1.2@77.375,62.865 BMPC1.2@77.375,62.915 ; BAR.5@77.594,64.524 77.579,64.524 77.531,64.476 77.531,64.461 77.375,64.305 BMPC1.2@77.375,62.915 ; v2(77.978,29.972) 78.228,30.222 V31U1.6@78.228,31.372 V31U1.6@78.228,31.543 ; USBU1.4@78.097,81.99 78.992,81.99 v1(79.604,82.601) ; V31U1.15@78.228,28.572 78.228,29.249 78.451,29.472 v2(78.478,29.472) 78.728,29.222 V31U1.16@78.728,28.572 V31U1.16@78.728,28.401 ; v1(78.486,32.385) v1@78.512,32.359 ; V31U1.5@78.728,31.372 V31U1.5@78.728,31.543 ; BAR.8@79.124,64.524 79.152,64.524 79.297,64.378 79.297,64.37 79.891,64.37 ; BAR.9@79.124,65.024 79.735,65.024 79.891,64.868 79.891,64.37 ; 80.017,64.37 79.891,64.37 ; BMPC2.2@80.316,64.443 80.445,64.443 BMPC2.2@80.518,64.37 ; BMPC2.2@80.568,64.37 80.641,64.297 BMPC2.2@80.641,64.247 ; v1@80.95,63.427 v1(81.016,63.361) ; v1(81.229,101.727) 81.711,102.209 82.429,102.209 SD.G1@82.827,102.607 ; SD.10@82.652,92.882 82.552,92.882 81.422,91.752 81.422,91.303 v1(81.356,91.237) 82.391,91.237 SDC1.2@83.312,90.316 ; SDC2.2@84.963,90.295 84.963,90.316 84.201,91.078 v1(84.201,92.812) 84.972,92.812 85.877,91.907 SD.G4@86.152,91.907 ; v1(88.976,85.852) 89.362,85.466 USB.S2@91.131,85.466 ; SD.6@90.787,102.732 90.805,102.714 v1(90.805,100.889) ; SD.G3@92.122,91.907 92.391,91.907 92.939,92.455 v1(92.939,93.269)
  Top Layer w0.3: STC13.2@51.381,68.272 51.827,68.272 52.106,67.993 ST.19@53.083,67.993 v1@54.816,67.993 ; STC12.2@54.556,80.972 54.893,80.972 55.333,80.532 ST.99@55.333,78.743 ; ST.49@66.333,63.243 66.333,62.318 66.525,62.126 66.734,62.126 66.927,61.934 VCAP2.2@66.927,61.468 ; v1@67.122,76.493 ST.74@68.583,76.493 69.56,76.493 69.9,76.833 VCAP1.2@70.485,76.833
  Top Layer w0.381: POWC4.2@36.701,78.537 v1@37.643,78.537 ; POWC3.2@36.73,76.7 v1@37.574,76.7 ; v1(37.465,97.79) 38.984,97.79 CANC4.2@39.212,98.018 ; CANC4.2@39.234,98.018 CANC4.2@39.37,98.154 ; CANC4.2@39.382,98.164 CANC3.2@41.136,98.164 ; HSEC1.2@45.758,76.892 45.766,76.884 45.766,75.817 v1(45.774,75.81) ; v1(48.222,65.43) 48.272,65.43 48.63,65.788 STC2.2@49.53,65.788 51.237,65.788 51.258,65.767 STC9.2@51.308,65.767 ; STC1.2@49.657,68.324 51.237,68.324 51.258,68.345 STC13.2@51.308,68.345 ; v1@49.933,99.432 BOOTC1.2@50.899,99.432 ; v1(51.46,81.763) 51.52,81.763 51.827,81.455 STC3.2@52.756,81.455 54.023,81.455 54.433,81.045 STC12.2@54.483,81.045 ; STC6.2@53.778,61.629 53.788,61.629 53.788,61.967 54.655,62.833 ST.26@54.792,62.833 ; ICMU2.4@55.487,56.864 55.914,56.436 55.914,55.795 v1(55.956,55.753) ; v1(57.658,50.419) 57.717,50.419 57.952,50.654 ICMC4.2@59.944,50.654 ; v1(58.064,55.778) 58.064,55.838 58.388,56.161 58.388,56.694 58.422,56.729 ICMU1.4@58.428,56.729 ; DEU2.4@66.254,95.496 66.254,96.226 66.802,96.774 68.504,96.774 v1(68.529,96.749) ; VCAP2.2@66.927,61.468 66.948,61.468 66.994,61.422 66.994,61.401 67.581,60.814 STC10.2@68.453,60.814 68.453,60.165 v1@68.199,59.911 ; v1@68.479,59.883 68.521,59.925 STC11.2@70.104,59.925 ; VCAP1.2@70.485,76.854 70.739,77.108 STC8.2@70.739,78.232 ; STC8.2@70.812,78.355 71.514,79.057 v1(71.514,80.01) 71.514,81.039 72.7,82.225 v1@73.335,82.225 ; v1@76.154,19.438 v1@76.175,19.417 ; 76.646,35.306 76.646,32.447 76.835,32.258 76.835,31.936 ; 80.017,64.37 BMPC2.2@80.395,64.37 ; BMPC2.2@80.641,64.247 80.95,63.938 v1@80.95,63.427 ; SPIEU3.4@82.523,43.696 82.547,43.672 82.547,43.158 v1(83.21,42.494) ; SPIEU2.4@84.134,46.355 84.134,45.482 v1(84.785,44.831) ; v1(85.522,67.183) 85.564,67.225 85.564,67.506 86.049,67.992 I2CEU1.4@86.749,67.992 ; SPIEU1.4@86.574,46.601 86.574,47.704 86.741,47.871 v1(86.741,47.93) ; GPS2U1.4@88.467,49.244 89.29,48.42 89.29,48.327 v1(89.332,48.285) ; GPS1U1.4@88.678,60.106 89.466,60.106 89.958,59.614 v1(90.018,59.614) ; v1(88.882,77.013) 89.7,77.83 89.948,77.83 89.95,77.832 90.171,77.832 90.281,77.941 USB.A1_B12@90.551,77.941 ; USB.B1_A12@90.551,84.341 90.281,84.341 89.259,85.363 89.259,85.51 88.976,85.793 v1(88.976,85.852) 88.993,85.868 88.993,86.723 89.256,86.987 v1(89.256,87.046) 89.315,87.046 89.518,87.249 USBR2.2@91.298,87.249 91.298,88.005 91.827,88.534 USBR1.2@94.488,88.534
  Top Layer w0.508: CAN.6@24.088,102.144 24.271,101.961 v1(25.917,101.961) ; v1(24.139,97.77) 24.164,97.77 24.742,98.348 25.892,98.348 25.938,98.394 CAN.4@25.938,98.944 ; 25.5,86.157 25.677,86.333 TELEM2.6@28.194,86.333 ; v1(29.693,101.854) 31.292,101.854 31.538,102.1 CAN.5@31.538,102.144 ; v1(32.842,90.246) TELEM2U1.4@34.292,90.246 ; RCINU1.4@34.028,42.458 35.19,42.458 35.789,41.859 ; TELEM1.8@37.57,105.319 37.57,104.901 TELEM1.8@37.816,104.655 ; v1@37.574,76.7 v1(37.592,76.683) ; v1@37.643,78.537 37.694,78.486 v1(37.719,78.486) ; v1@39.801,104.63 v1(39.801,104.655) 39.825,104.655 v1@39.902,104.579 ; v1(40.452,75.289) 40.47,75.271 41.932,75.271 HSE.2@41.976,75.227 ; v1(42.493,104.579) 42.518,104.579 v1@42.569,104.528 ; v1(49.657,93.98) 49.657,93.955 50.211,93.402 50.211,92.743 TELEM1U1.4@50.252,92.702 ; 57.468,102.94 57.468,101.69 57.468,99.708 57.449,99.69 57.449,97.719 v1(57.455,97.714) 57.455,97.689 57.292,97.526 57.292,92.516 57.292,91.558 NRST_C1.2@57.893,90.957 ; DEU1.4@61.714,98.973 62.292,98.973 62.416,98.849 63.457,98.849 v1(63.475,98.831) ; NRST.3@62.103,101.585 v1(62.103,102.679) ; DEBUG.5@70.642,101.484 70.642,104.076 70.688,104.122 ; USBR4.2@79.345,71.628 79.431,71.714 79.431,72.592 USBC4.2@80.245,73.406 80.245,74.949 80.517,75.221 81.243,75.221 ; v1(83.185,74.295) 83.331,74.441 84.295,74.441 84.549,74.695 USBC1.2@84.963,74.695 USBC2.2@86.614,74.695 ; v1(88.392,31.191) 88.405,31.204 90.005,31.204 v1(90.018,31.217) 90.042,31.217 90.283,30.976 SPI.8@93.826,30.976 ; v1(88.882,77.013) 88.882,76.988 88.46,76.566 88.46,76.218 v1(88.443,76.2) 88.46,76.182 89.311,76.182 89.657,75.837 USBC3.2@89.657,74.803 ; SPI.7@90.689,40.326 90.731,40.368 92.515,40.368 v1(92.532,40.386) 92.557,40.386 93.072,39.871 93.556,39.871 ; USB.S1@91.131,76.816 92.592,76.816 v1(95.283,79.506) ; GPS.6@91.832,63.958 93.832,63.958 93.937,64.063 v1(93.962,64.063) 93.962,64.038 94.572,63.429 v1(94.572,61.955) ; I2C.4@91.832,73.249 91.856,73.225 93.944,73.225 v1(93.962,73.207) 93.98,73.19 94.285,73.19 94.928,72.547 v1(94.953,72.547) 94.953,75.02 I2C.6@95.032,75.099 ; GPS2.6@91.959,52.274 91.972,52.261 v1@93.967,52.261 ; v1(93.548,38.456) 93.556,38.463 93.556,39.806 93.721,39.971 93.721,40 94.132,40.412 v1(94.132,40.437) 94.132,40.462 94.089,40.505 94.089,42.194 SPI.9@94.19,42.295 ; v1(93.98,52.248) 93.998,52.23 94.302,52.23 94.775,51.758 ; 94.589,62.811 95.029,63.251 v1(95.029,63.276) 95.029,65.805 GPS.8@95.032,65.808 ; v1(94.775,51.109) 94.775,51.758 ; GPS2.8@94.869,54.005 95.207,54.005 95.334,53.878 v1(95.334,52.379) ; USB.S3@95.301,76.816 95.292,76.825 95.292,79.497 v1(95.283,79.506) ; USB.S4@95.301,85.466 95.292,85.457 95.292,83.3 v1(95.283,83.291) v1(95.283,81.488) v1(95.283,79.506) ; v1@95.316,52.362 94.775,51.82 94.775,51.758
  Top Layer w0.635: V5C1in.2@54.102,29.724 54.362,29.984 V5C1in.2@54.926,29.984 ; 54.626,32.782 54.626,32.7 v1(55.397,31.928) 55.347,31.877 55.347,31.273 ; V32C2.2@77.204,23.114 77.287,23.197 V32C2.2@77.287,23.247 ; 78.454,21.401 78.512,21.459 ; GPS.8@95.032,65.808 I2C.5@95.032,67.649
  Top Layer w0.762: TELEM2.8@24.994,84.483 25.381,84.483 25.5,84.602 25.5,86.157 v1(25.5,87.256) v1(25.5,89.745) 25.5,91.752 v1(25.475,91.777) 25.475,94.314 25.356,94.433 TELEM2.7@24.994,94.433 ; POWER.MP1@26.706,80.823 v1(32.436,80.823) ; CANU1.9@34.925,97.79 v1(37.465,97.79) ; TELEM1.8@37.816,104.655 v1(39.801,104.655) ; TELEM1.6@39.42,102.119 39.42,104.25 v1@39.801,104.63 ; v1@39.902,104.579 v1(42.493,104.579) ; v1@42.569,104.528 v1(44.881,104.528) 46.729,104.528 TELEM1.7@47.52,105.319 ; TELEM1.7@47.401,104.851 47.639,104.613 47.639,104.35 48.384,104.35 49.794,102.94 BOOT.5@49.832,102.94 ; 53.238,29.136 V5C1in.2@53.826,29.724 ; 54.102,32.258 54.626,32.782 ; BOOT.4@55.832,102.94 57.468,102.94 NRST.5@59.103,102.94 ; NRST.4@65.103,102.94 65.141,102.94 65.916,103.715 67.423,103.715 67.542,103.834 DEBUG.8@67.542,104.132 ; DEBUG.8@67.542,104.684 DEBUG.8@67.542,104.241 ; DEBUG.8@67.61,104.064 DEBUG.8@67.542,104.132 ; DEBUG.7@77.492,104.684 77.492,104.215 77.373,104.096 v1(74.421,104.096) 72.389,104.096 v1(72.363,104.071) 72.313,104.122 70.688,104.122 v1(69.95,104.122) 67.661,104.122 DEBUG.8@67.542,104.241 ; USBD1.2@81.243,77.47 81.243,75.221 82.072,74.392 83.088,74.392 v1(83.185,74.295) ; SPI.9@94.19,42.295 94.19,44.055 94.309,44.174 GPS2.7@95.159,44.174 ; GPS.7@95.032,55.858 95.04,55.85 95.04,54.243 GPS2.8@95.159,54.124 ; DEBUG.8@67.542,104.132 DEBUG.8@67.542,104.241
  Top Layer w0.889: V5IC1.13@50.796,29.136 53.238,29.136
  Top Layer w1: v3(25.248,70.688) 26.645,70.688 26.657,70.676 ; 26.645,70.676 26.657,70.676 ; POWER.MP2@26.695,66.326 26.772,66.402 26.772,70.561 26.657,70.676 ; POWER.6@31.145,68.676 35.414,68.676 ; 36.018,68.072 35.414,68.676 ; v3@36.173,68.072 v3(36.779,68.072) ; 26.657,70.676 POWER.5@31.145,70.676 33.414,70.676 35.414,68.676
  Top Layer w1.27: 46.733,19.804 46.733,19.849
  Top Layer w1.778: V5Con.2@30.861,32.512 V5Con.1@30.861,35.052 32.435,36.626 ; V5D2.2@35.51,38.391 V5D2.2@35.56,38.391 V5D2.2@35.61,38.391
  Int1 (GND) w0.254: 73.825,21.78 73.914,21.692 v2(73.914,19.939) ; v2(77.978,29.972) 77.978,31.559 78.003,31.585
  other v1: 69.395,11.52 69.42,13.196 69.42,14.644 69.369,16.447 69.395,17.793 77.089,19.482 69.369,19.521 69.395,21.299 79.223,22.835 45.593,22.936 69.369,23.077 79.197,24.206 45.644,24.46 69.344,24.778 79.121,25.629 77.876,25.679 45.618,25.857 69.369,26.531 68.125,27.471 79.248,27.813 81.229,27.94 82.804,27.94 69.395,28.055 60.96,28.778 68.072,28.829 66.192,28.854 64.237,28.88 62.689,28.919 47.095,29.704 48.187,29.704 61.699,30.163 69.344,30.189 63.477,30.214 65.126,30.226 67.031,30.226 38.484,30.67 60.915,31.285 62.435,31.332 64.289,31.433 65.89,31.459 68.125,31.459 70.329,31.652 53.975,31.928 38.405,33.096 71.929,33.15 55.806,33.719 73.127,34.95 57.228,34.964 77.851,35.687 38.637,36.004 54.94,36.17 58.295,36.437 58.268,38.024 38.637,38.606 57.226,39.192 35.817,40.017 58.242,40.335 37.897,40.462 57.175,41.478 37.989,42.109 58.318,42.697 36.402,42.836 38.049,43.713 57.201,43.739 58.268,44.831 38.239,45.541 54.915,45.898 58.471,46.787 40.135,47.18 57.152,47.715 73.127,48.438 56.515,50.419 55.245,50.546 55.118,51.943 52.219,54.358 52.105,56.009 55.855,64.973 63.398,68.008 60.477,68.339 55.702,69.253 58.75,69.469 61.658,69.926 57.34,70.675 60.084,70.701 66.621,70.906 58.763,71.717 58.433,73.139 66.621,73.979 64.716,74.106 82.048,74.389 62.722,74.665 79.054,75.452 61.719,76.722 61.008,84.05 58.836,87.301 57.266,92.516 57.444,99.67 57.482,101.69 94.147,102.382
  other v2: 74.414,19.439 73.414,20.439 77.478,29.472 78.478,30.472
I2C_3_SCL: GPS2.4 GPS.4 I2C.2 I2CER1.2 I2CEU1.5 ST.46 | length 58.3
  Top Layer w0.254: v1(64.389,65.33) 64.833,64.886 ST.46@64.833,63.243 ; v1(80.899,66.802) 81.915,65.786 I2CER1.2@82.931,65.786 ; I2CER1.2@82.931,65.836 86.995,65.836 ; v1(87.452,56.921) 87.452,56.515 89.256,54.712 89.256,51.156 90.637,49.774 GPS2.4@91.959,49.774 ; GPS.4@91.832,61.458 88.123,61.458 v1(86.995,62.586) 86.995,65.836 ; I2C.2@91.832,70.749 90.506,70.749 87.847,68.09 87.772,68.09 87.749,68.067 87.749,67.917 87.726,67.894 87.652,67.894 87.503,67.745 87.503,67.183 86.995,66.675 86.995,65.836
  Bottom Layer w0.254: v1(64.389,65.33) 65.348,65.33 67.379,67.361 78.451,67.361 79.01,66.802 v1(80.899,66.802) ; v1(86.995,62.586) 87.427,62.154 87.427,56.947 v1(87.452,56.921)
I2C_3_SDA: GPS2.5 GPS.5 I2C.3 I2CER2.2 I2CEU1.3 ST.47 | length 59.5
  Top Layer w0.254: v1(65.303,66.815) 65.333,66.785 ST.47@65.333,63.243 ; v1(80.848,68.199) 80.914,68.133 81.453,68.133 81.656,67.93 I2CER2.2@82.931,67.93 82.946,67.945 84.709,67.945 86.106,69.342 I2CEU1.3@86.749,69.342 ; I2CEU1.3@86.749,69.402 86.749,70.264 88.459,71.975 88.866,71.975 v1(88.89,71.999) I2C.3@91.832,71.999 ; v1(88.773,56.947) 88.773,56.49 89.967,55.296 89.967,51.486 90.429,51.024 GPS2.5@91.959,51.024 ; v1(88.875,67.031) 88.875,63.475 89.641,62.708 GPS.5@91.832,62.708
  Bottom Layer w0.254: v1(65.303,66.815) 66.484,67.996 80.551,67.996 80.755,68.199 v1(80.848,68.199) ; v1(88.773,56.947) 88.773,63.204 88.834,63.264 88.834,63.459 v1(88.9,63.525) ; v1(88.875,67.031) 88.89,67.046 v1(88.89,71.999)
ICM_SPI_CS: ICMU2.3 IM1.5 ST.28 | length 12.1
  Top Layer w0.254: ST.28@55.833,63.243 55.833,60.98 53.086,58.233 53.086,57.166 53.348,56.904 54.102,56.904 54.102,56.278 56.277,54.103 IM1.5@56.277,54.057
ICM_SPI_INT: IM1.6 ST.32 | length 17.3
  Top Layer w0.254: v1(54.61,54.61) 54.728,54.61 56.006,53.332 IM1.6@56.052,53.332 ; ST.32@57.833,63.243 57.833,62.157 58.217,61.773 58.877,61.773 60.579,60.071 60.579,56.863 60.833,56.609 v1(60.833,56.515)
  Bottom Layer w0.254: v1(54.61,54.61) 58.572,54.61 60.428,56.465 60.783,56.465 v1(60.833,56.515)
ICM_SPI_MISO: ICMU2.5 IM1.4 ST.30 | length 10.8
  Top Layer w0.254: ICMU2.5@55.512,57.904 ICMU2.5@55.692,57.904 ; IM1.4@56.777,54.057 56.777,57.117 55.995,57.898 55.458,57.898 55.452,57.904 55.452,58.373 56.833,59.754 ST.30@56.833,63.243
ICM_SPI_MOSI: ICMU1.3 IM1.3 ST.31 | length 10.1
  Top Layer w0.254: IM1.3@57.277,54.057 57.277,56.853 58.428,58.004 58.428,58.079 58.428,60.581 57.315,61.694 57.315,63.225 ST.31@57.333,63.243
ICM_SPI_SCK: ICMU1.5 IM1.2 ST.29 | length 16.2
  Top Layer w0.254: v1(55.158,59.256) 55.225,59.256 56.333,60.364 ST.29@56.333,63.243 ; IM1.2@57.777,54.057 57.777,54.399 59.428,56.05 ICMU1.5@59.428,56.669 59.451,56.692 59.451,56.936 59.969,57.455 59.969,58.758 59.436,59.292 v1(59.436,59.995)
  Bottom Layer w0.254: v1(55.158,59.256) 58.697,59.256 v1(59.436,59.995)
NetBOOT_SW_1: BOOT.1 BOOTR1.1 ST.94 | length 24.7
  Top Layer w0.254: BOOT.1@53.832,101.585 53.832,100.346 55.992,98.186 BOOTR1.1@55.992,95.123 55.992,87.264 v1(56.769,86.487) ; ST.94@57.833,78.743 57.833,80.693 58.026,80.886 58.026,81.358 v1(58.093,81.424)
  Bottom Layer w0.254: v1(56.769,86.487) 56.769,86.36 58.093,85.036 v1(58.093,81.424)
NetHSE_1: HSE.1 HSER1.2 | length 2.2
  Top Layer w0.508: HSER1.2@41.412,79.4 41.412,78.091 41.976,77.527 HSE.1@41.976,77.427
NetHSE_3: HSE.3 ST.12 | length 11.3
  Top Layer w0.254: 48.293,71.493 ST.12@53.083,71.493
  Top Layer w0.381: HSE.3@43.876,75.213 HSE.3@43.876,75.227 43.876,75.165 44.286,74.756 45.031,74.756 48.293,71.493
  Top Layer w0.508: HSE.3@43.876,75.227 43.876,75.225 HSE.3@44.222,74.879
NetICMC4_1: ICMC4.1 IM1.14 | length 1.8
  Top Layer w0.254: IM1.14@58.502,52.332 58.548,52.332 59.353,51.527 59.871,51.527 ICMC4.1@59.944,51.454
NetLSE_2: LSE.2 ST.8 | length 5.3
  Top Layer w0.254: LSE.2@48.387,74.876 49.592,73.671 51.848,73.671 52.025,73.493 ST.8@53.083,73.493
NetPOWER_3: POWER.3 POWR1.1 | length 10.3
  Top Layer w0.762: POWER.3@31.145,74.676 35.56,74.676 37.846,72.39 POWR1.1@40.483,72.39